# Altium PCB DC-DC Converter.PcbDoc (part 2 of 3)
Units mil, origin at the board's own origin, x right, y up, seen from the top; angles counter-clockwise.
Board outline 6692.91 x 3543.31 mil, 4 copper layers (Top Layer, GND, Power, Bottom Layer), stack 23.756 mil thick; 100 components, 76 nets, 345 pads, 803 vias.
Unrouted connection lines stored in the file: 1.
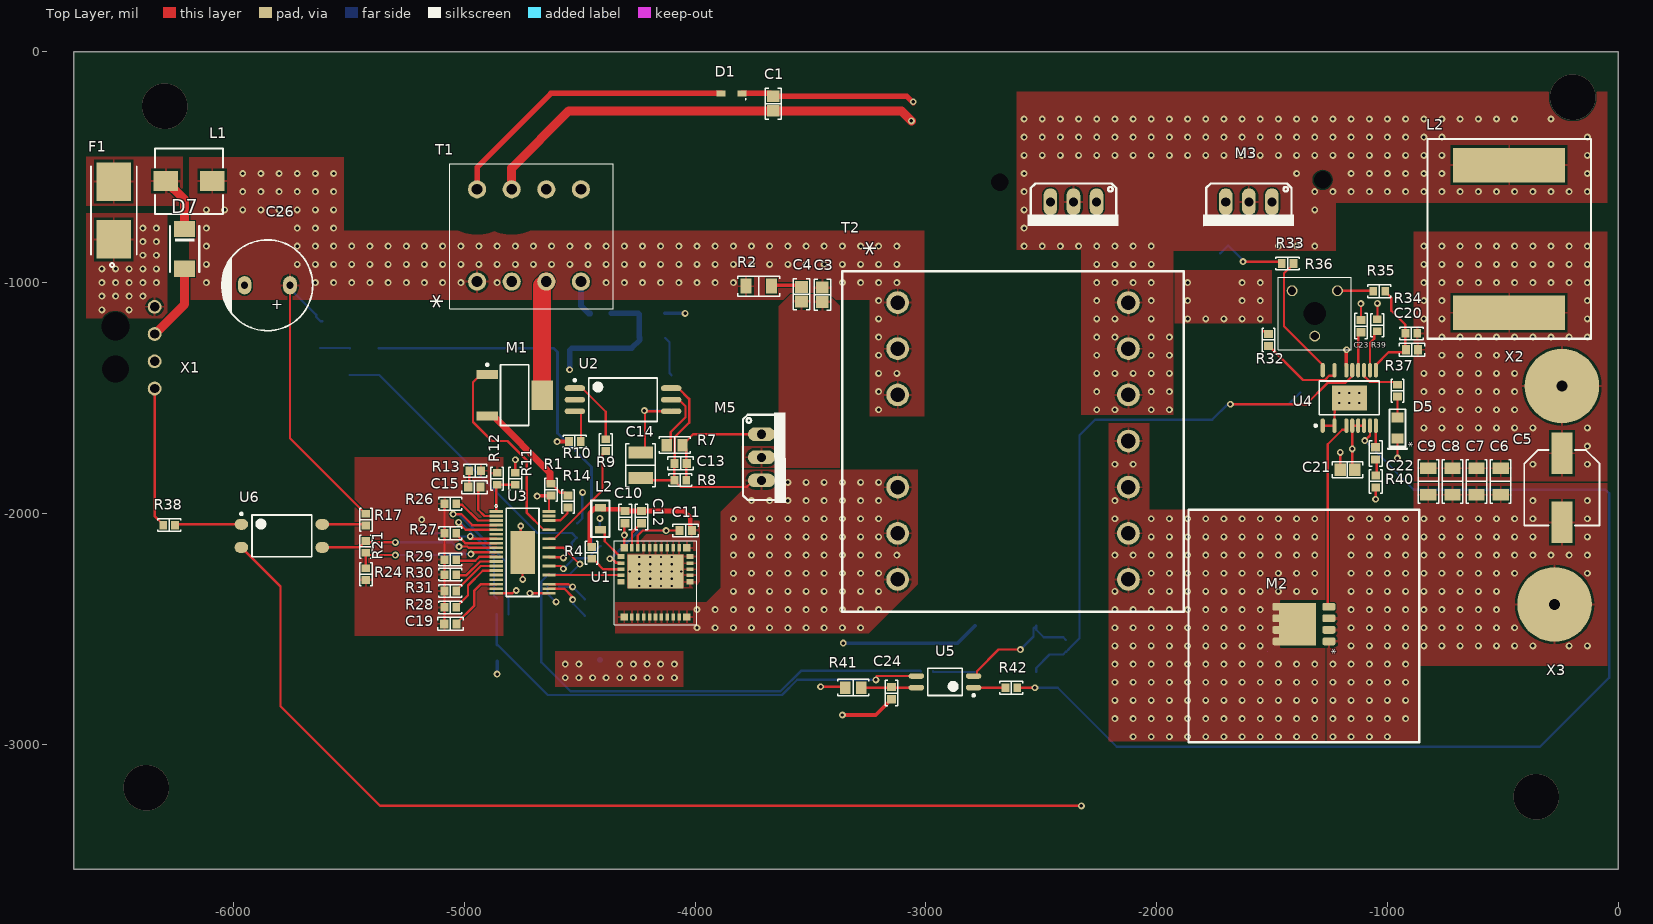
[diagram p0: Top Layer view]

## Part data (continued)
T3: library part 2, "PULSE XFMR 1:1 785UH", Manufacturer_id=1, MfrPartNo=PE-68386NLT, Package=SMD, Supplier1PartNo=553-1776-1-ND, Voltage_Primary=380Vrms, ComponentLink1Description=Datasheet, ComponentLink1URL=file:///C:/Users/Nick%20Mah/Downloads/SPM2007_61.pdf, Created_By="Nick Mah", Drawer_id=1, idTransformer=2, Link=https://www.digikey.com/product-detail/en/pulse-electronics-power/PE-68386NLT/553-1776-1-ND/4494729, Name="500W DC-DC Sync Trfrmr", Supplier1=Digi-Key
U1: library part 19, "N-Channel 600-V 50mOhm GaN with integrated driver and protection", Manufacturer_id=1, MfrPartNo=XLMG3410R050RWHT, Package="VQFN RWH", ComponentLink1Description=Datasheet, ComponentLink1URL=http://www.ti.com/lit/ds/symlink/lmg3410r050.pdf, Created_By="Jason Zhou", Created_Date=4/18/2019, Drawer_id=1, Id=12A, idFETs=19, Link=http://www.ti.com/product/LMG3410R050?qgpn=lmg3410r050, Name=LMG3410R050, Num_Circuits=1, Rds_On=50mOhm, Vdss=600V
U2: library part 5, "OPTOISO 5KV 1CH GATE DRIVER 6SO", Current_Rating=2.5A, Manufacturer_id=1, MfrPartNo=ACPL-W346, Package="SOIC-6 Stretched", Supplier1PartNo=516-3743-1-ND, ComponentLink1Description=Datasheet, ComponentLink1URL=https://docs.broadcom.com/docs/AV02-4078EN, Created_By=Nick, Drawer_id=1, idPMIC_SW=5, Link=https://www.digikey.com/product-detail/en/broadcom-limited/ACPL-W346-500E/516-3743-1-ND/6823064, Name=ACPL-W346, Num_Outputs=1, Output_Config=1, Power=2.5A, Supplier1=Digi-Key, Topology="Bootstrapped Gate Drive", Vin(Max)=20V, Vin(Min)=10V, Vout(Max)=20, Vout(Min)=0
U3: library part 3, "Forward Converter Regulator Positive, Isolation Capable Output Step-Up/Step-Down DC-DC Controller IC 6.5-100V Input", Manufacturer_id=1, MfrPartNo=LT3752FE-1, Package=38-TSSOP, Power=400W, Supplier1PartNo=LT3752EFE-1#PBF-ND, Availability=Unavailable, ComponentLink1Description=Datasheet, ComponentLink1URL=https://www.analog.com/media/en/technical-documentation/data-sheets/8311f.pdf, Created_By=Jason, Discrete=No, Drawer_id=1, Fs=100-500kHz, idPMIC_SW=3, Link=https://www.digikey.com/product-detail/en/linear-technology-analog-devices/LT3752EFE-1-PBF/LT3752EFE-1-PBF-ND/4814575, MF="Linear Technology/Analog", MP=LT3752EFE-1#PBF, Name="LT3752-1 DC-DC Converter", Num_Outputs=1, Price=None, SnapEDA_Link=https://www.snapeda.com/parts/LT3752EFE-1%23PBF/Analog%20Devices/view-part/?ref=snap, Supplier1=Digi-Key, Topology="Isolated Forward", Vin(Max)=100V, Vin(Min)=6.5V, Vout_Type=Adjustable
U4: library part 4, "Power Supply Controller Secondary-Side Controller", Manufacturer_id=1, MfrPartNo=LT8311FE, Package=20-TSSOP, Supplier1PartNo=LT8311HFE#PBF-ND, ComponentLink1Description=Datasheet, ComponentLink1URL=https://www.analog.com/media/en/technical-documentation/data-sheets/8311f.pdf, Created_By=Jason, Discrete=No, Drawer_id=1, idPMIC_SW=4, Link=https://www.digikey.com/product-detail/en/linear-technology-analog-devices/LT8311HFE-PBF/LT8311HFE-PBF-ND/4808890, Name="LT8311 MOSFET Driver", Num_Outputs=1, Supplier1=Digi-Key, Topology="Synchronous Rectifier", Vout_Type=Adjustable
U5: library part 36, "Optoisolator Darlington Output 2500Vrms 1 Channel 4-SSOP", Manufacturer_id=1, MfrPartNo=PS2802-1-A, Package=SOIC-4, Supplier1PartNo=559-1102-ND, ComponentLink1Description=Datasheet, ComponentLink1URL=https://www.renesas.com/en-us/doc/YOUSYS/document/002/PN10252EJ02V0DS.pdf, Created_By="Nick Mah", Drawer_id=1, idIC_Misc=36, Link=https://www.digikey.com/product-detail/en/renesas-electronics-america/PS2802-1-A/559-1102-ND/9564743, Name=PS2802-1-A, Num_Circuits=1, Protocol=Null, Supplier1=Digi-Key, Type=Optoisolator, Vin(Max)="80V Vce"
U6: library part 26, "Solid State Relay SPST-NO (1 Form A) 4-SMD (0.300\", 7.62mm)", Manufacturer_id=1, MfrPartNo=CPC1393GRTR, Package=CPC1393GR, Supplier1PartNo=Null, ComponentLink1Description=Null, ComponentLink1URL=Null, Created_By=Lynette, Data_Rate=Null, Drawer_id=1, idIC_Misc=26, Link=https://www.digikey.com/product-detail/en/ixys-integrated-circuits-division/CPC1393GRTR/CLA270CT-ND/1277144, Name=CPC1393, Num_Circuits=1, Protocol=Null, Supplier1=Null, Type=Null, Updated_By=Null, Vin(Max)=Null, Vin(Min)=Null
X1: library part 6, Manufacturer_id=4, Package=Conn, Supplier1PartNo=WM11252-ND, Voltage_Rating=600V, ComponentLink1Description=Datasheet, ComponentLink1URL=https://www.mouser.com/datasheet/2/276/0436500402_PCB_HEADERS-148886.pdf, Created_By=Nick, Drawer_id=1, idConn=6, Link=https://www.digikey.com/product-detail/en/molex-llc/0436500402/WM11252-ND/3310554, MfrPartNo=43650-0402, Name="Molex 43650_0402", Num_Contacts=4, Num_Rows=1, Pitch=3mm, Supplier1=Digi-Key
X2 X3: library part 26, "1 Pin Shank Terminal M3 Surface Mount", Manufacturer_id=1, ComponentLink1Description=Datasheet, ComponentLink1URL=https://katalog.we-online.com/em/datasheet/7466113.pdf, Created_By="Jason Zhou", Created_Date=4/19/2019, Drawer_id=1, idConn=26, Link=https://katalog.we-online.de/en/em/WP-SMSH_PIN, MfrPartNo=7466113, Name=7466113, Num_Contacts=1, Supplier1=Digi-Key, Supplier1PartNo=https://www.digikey.com/product-detail/en/wurth-electronics-inc/7466113/732-5246-ND/4733838

## Via types
v1: diameter 30, hole 15, Top Layer to Bottom Layer, 791 vias
v2: diameter 19.68, hole 10, Top Layer to Bottom Layer, 6 vias
v3: diameter 196.85, hole 196.85, Top Layer to Bottom Layer, 4 vias
v4: diameter 47.24, hole 47.24, Top Layer to Bottom Layer, 2 vias

## Nets (pads, with @x,y where several pads share a name; then routed paths per layer and width w, separated by ;. In a path a pad name is that pad's centre, name@x,y a point inside that pad or via, vN(x,y) a via of type N, cw(c..) or ccw(c..) an arc to the next point about the centre after c; other vN are vias at no path point)
8311_COMP: C22.2 U4.10 | length 94.2
  Top Layer w10: C22.2@-1051.01,-1713.42 -1051.01,-1620.08 U4.10@-1050.2,-1620.08
8311_COMP_MID: C22.1 R40.2 | length 73.4
  Top Layer w10: R40.2@-1051.18,-1836.61 -1047.08,-1832.51 -1047.08,-1770.5 C22.1@-1051.01,-1766.56
8311_CSN: R32.1 U4.18 | length 377.3
  Top Layer w10: R32.1@-1515.75,-1274.6 -1513.78,-1274.6 -1365.96,-1422.42 -1271.28,-1422.42 -1252.9,-1404.04 -1232.9,-1404.04 -1229.33,-1400.47 U4.18@-1229.33,-1379.92
8311_CSP: R33.1 U4.20 | length 548.8
  Top Layer w10: R33.1@-1407.48,-917.32 -1407.48,-919.29 -1448.01,-959.82 -1448.01,-1189.79 -1280.51,-1357.28 U4.20@-1280.51,-1379.92
8311_FB: C20.1 R34.1 R35.2 U4.11 | length 473.5
  Top Layer w10: U4.11@-1050.2,-1379.92 -1050.2,-1357.28 -994.36,-1301.45 -926.13,-1301.45 -920.28,-1295.59 C20.1@-920.28,-1291.34 ; R35.2@-1009.84,-1037.4 -1009.84,-1039.37 -982.99,-1066.22 -982.99,-1122.49 -923.15,-1182.33 -923.15,-1218.66 R34.1@-921.51,-1220.3 -921.51,-1220.47 -923.15,-1222.12 -923.15,-1280.76 -918.38,-1285.52 C20.1@-918.38,-1289.29
8311_FB_R: R35.1 R36.1 | length 156.3
  Top Layer w10: R36.1@-1216.54,-1035.43 -1062.99,-1035.43 R35.1@-1061.02,-1037.4
8311_SS: C23.1 U4.14 | length 169.8
  Top Layer w10: U4.14@-1126.97,-1379.92 -1126.97,-1227.1 C23.1@-1114.99,-1215.12
8311_TIMER: R39.2 U4.12 | length 183.6
  Top Layer w10: U4.12@-1075.79,-1379.92 -1075.79,-1261.08 -1057.66,-1242.95 -1057.66,-1222.36 -1045.92,-1210.63 R39.2@-1043.96,-1210.63